# EAGLE board offtimer_with_drill (EAGLE 9.6.2)
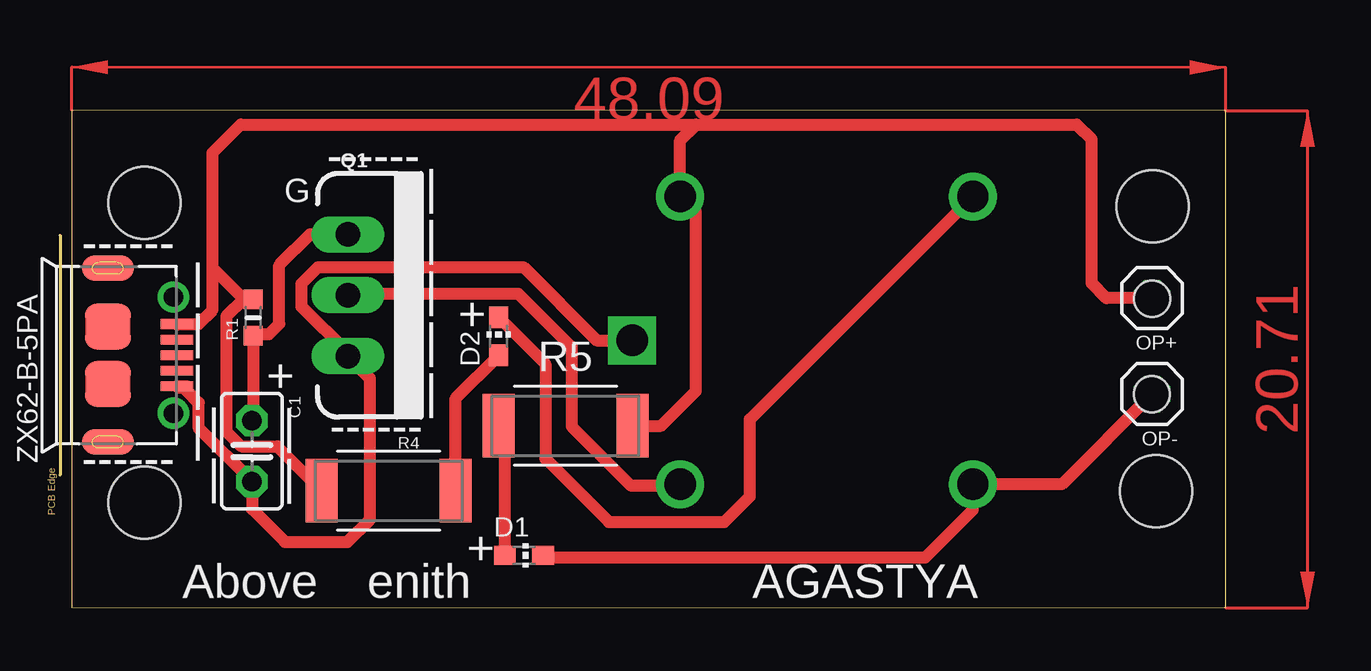
[diagram p0: board, top side]
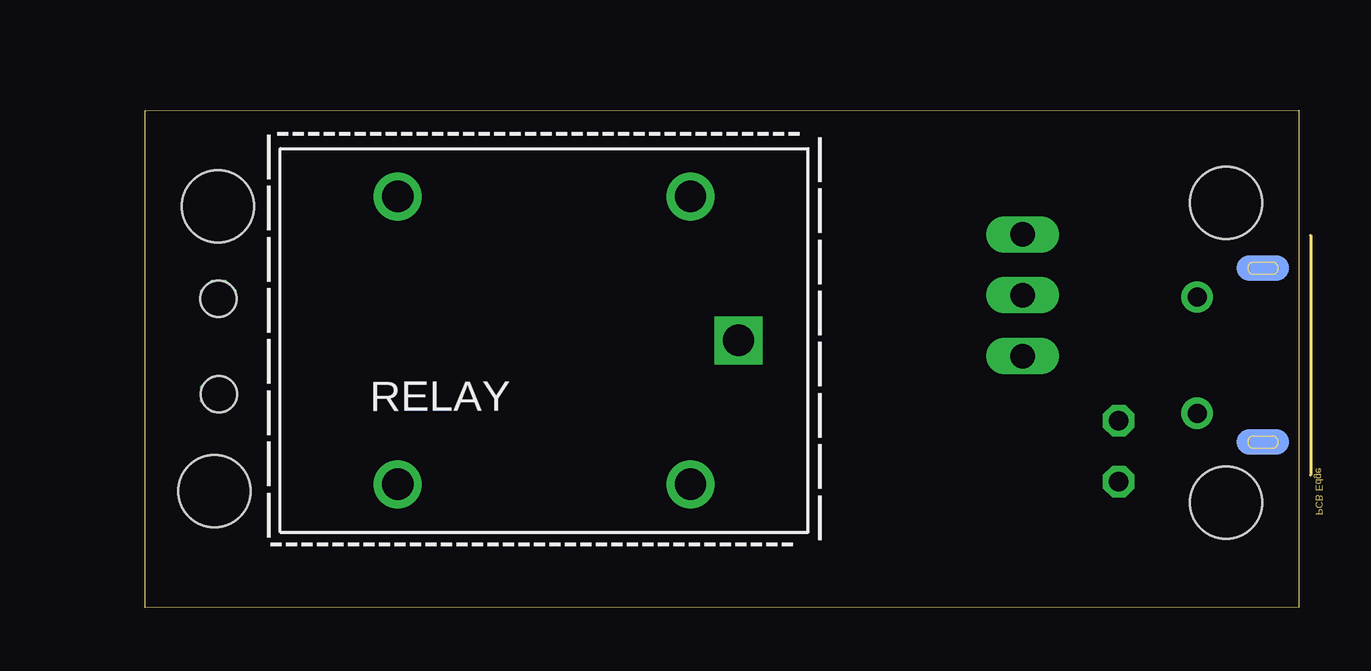
[diagram p1: board, bottom side, seen from below]

Size 48.09 x 20.73 mm. Coordinates in mm from the lower left corner, seen from the top.
Outline: 0,0.02 48.09,0 48.09,20.71 0,20.73 0,0.02
Copper layers (1*16): Top 0.035mm / dielectric 1.5mm / Bottom 0.035mm
Design rules "default *": minimum track width 6mil, minimum drill 0.35mm, track to track 6mil, track to pad 6mil, pad to pad 6mil, via to via 6mil, smd to smd 6mil, copper to edge 0mil, drill to drill 6mil, minimum pad ring 10mil, minimum via ring 8mil, stop-mask expansion 4mil, vias tented up to drill 0mil, thermal gap 10mil
Holes 1.5 mm at 45.02,12.88 45.01,8.9
Holes 3 mm at 3.02,16.88 3.02,4.38 45.19,4.85 45.04,16.72

## Footprints (pad centres in the part's own frame; a part is rotated, then mirrored left to right if it is on the bottom)
C025-025X050 = drill 0.813 octagon: 1 -1.27,0; 2 1.27,0
LED_CHIP-LED0603MP = smd 0.8 x 0.9: A 0,-0.794; C 0,0.794
1X01 = drill 1.016 octagon: 1 0,0
TO220V = drill 1.016 long: 1 -2.54,0; 2 0,0; 3 2.54,0
RC-MASTER-SMD_R0603MP = smd 0.8 x 0.8: 1 -0.762,0; 2 0.762,0
RESMELF5924 = smd 1.326 x 2.65: 1 -2.795,0; 2 2.795,0
JSM1-12V-5 = drill 1.3 pad 2 square: 1 8.1,0 | drill 1.3 pad 2: 2 6.1,6; 3 -6.1,6; 4 -6.1,-6; 5 6.1,-6
MICRO-USB5+6P-SMD-0.65-AB = smd 0.4 x 1.35: 1 -1.3,2.875; 2 -0.65,2.875; 3 0,2.875; 4 0.65,2.875; 5 1.3,2.875 | smd 1.9 x 1.9: P1 -1.2,0; P2 1.2,0 | smd 1.067 x 2.184 bottom: P3B -3.625,0; P4B 3.625,0 | smd 1.067 x 2.184: P3T -3.625,0; P4T 3.625,0 | drill 0.8: P5 -2.425,2.73; P6 2.425,2.73

## Placement (x,y rotation side)
C1  [C025-025X050]  7.5,6.52 270 top
D1  [LED_CHIP-LED0603MP]  18.84,2.17 270 top
D2  [LED_CHIP-LED0603MP]  17.78,11.31 0 top
OP+  [1X01]  45.02,12.9 0 top
OP-  [1X01]  45.02,8.9 0 top
Q1  60V/32A/35mΩ  [TO220V]  11.5,13.02 270 top
R1  1M  [RC-MASTER-SMD_R0603MP]  7.55,12.09 90 top
R4  10k  [RESMELF5924]  13.2,4.87 180 top
R5  10k  [RESMELF5924]  20.57,7.58 0 top
RELAY  JSM1-12V-5  [JSM1-12V-5]  31.45,11.14 0 bottom
USB1  ZX62-B-5PA  [MICRO-USB5+6P-SMD-0.65-AB]  1.5,10.52 270 top

## Library data of the parts
C1 = BeagleBone_Black_Wireless
D1 D2 R1 = 52101-101-REV-A_v16
OP+ OP- = pinhead
Q1 = SparkFun-DiscreteSemi; PROD_ID: TRANS-10060
R4 R5 = Resistor; CATEGORY: Resistor; SUB-CATEGORY: Fixed
RELAY = Relay; CREATED_BY: PCBLayout.com; DIGIKEY_PARTNO: 255-1240-ND; MANUFACTURER: Panasonic Electric Works; MPN: JSM1-12V-5
USB1 = OPL_Connector; MPN: ZX62-B-5PA

## Nets
GND: C1.2 Q1.3 RELAY.1 USB1.5
N$1: Q1.2 RELAY.5
N$2: D1.C OP-.1 RELAY.4
N$3: C1.1 Q1.1 R1.1
N$4: D1.A R5.1
N$5: D2.A R4.1
N$6: D2.C RELAY.3
VBUS: OP+.1 R1.2 R4.2 R5.2 RELAY.2 USB1.1

## Tracks (layer width: path | path; a pad name or v marks a point on that pad's centre or on a via)
GND
  Top 0.508: 4.67,9.16 4.44,9.16 USB1.5 4.8,9.22 4.8,9.03 5.29,8.54 5.29,7.46 C1.2 7.5,4.12 8.89,2.73 11.48,2.73 12.41,3.66 12.41,9.57 Q1.3 11.5,10.61 9.57,12.54 9.57,13.51 10.26,14.19 18.82,14.19 21.86,11.14 RELAY.1
N$1
  Top 0.508: RELAY.5 25.29,5.08 23.31,5.08 20.83,7.56 20.83,10.87 18.61,13.08 11.56,13.08 Q1.2
N$2
  Top 0.508: D1.C 19.73,2.08 35.56,2.08 37.55,4.07 RELAY.4 41.26,5.14 OP-.1
N$3
  Top 0.508: C1.1 7.55,7.84 R1.1 7.54,11.32 7.43,11.32 7.5,11.39 8.2,11.39 8.64,11.83 8.64,14.28 9.93,15.56 Q1.1
N$4
  Top 0.508: D1.A 18.05,7.31 R5.1
N$5
  Top 0.508: R4.1 16,8.73 D2.A
N$6
  Top 0.508: D2.C 19.74,10.15 19.74,6.22 22.39,3.57 27.2,3.57 28.26,4.63 28.26,7.85 RELAY.3
VBUS
  Top 0.508: 4.4,11.8 USB1.1 5.27,11.82 5.86,12.41 5.86,14.16 | 45.02,13 OP+.1 43.12,12.9 42.5,13.52 42.5,19.52 41.88,20.14 26,20.14 | 26,20.14 7.04,20.14 5.86,18.96 5.86,14.16 | 26,20.14 25.35,19.49 RELAY.2 26,16.49 26,9.02 24.56,7.58 R5.2 | 5.86,14.16 7.17,12.86 R1.2 7.15,12.86 6.44,12.14 6.44,7.35 7.06,6.73 8.55,6.73 R4.2
(copper drawn outside any net)
  shapes: Top area x2

## Text on the board
tPlace: ------ | G | ------ | + | + | | / | / | / | / | | | / | / | / | | ------ | ------ | | / | | | / | | + | Above Ẑenith | AGASTYA
bPlace: ---------------------------------- | | / | / | / | / | / | / | / | | | / | / | / | / | / | / | / | | ----------------------------------